# Altium PCB 摇杆总图.PcbDoc (part 1 of 2)
Units mil, origin at the board's own origin, x right, y up, seen from the top; angles counter-clockwise.
Board outline 1476.43 x 1476.37 mil, 2 copper layers (Top Layer, Bottom Layer); 8 components, 0 nets, 44 pads, 36 vias.
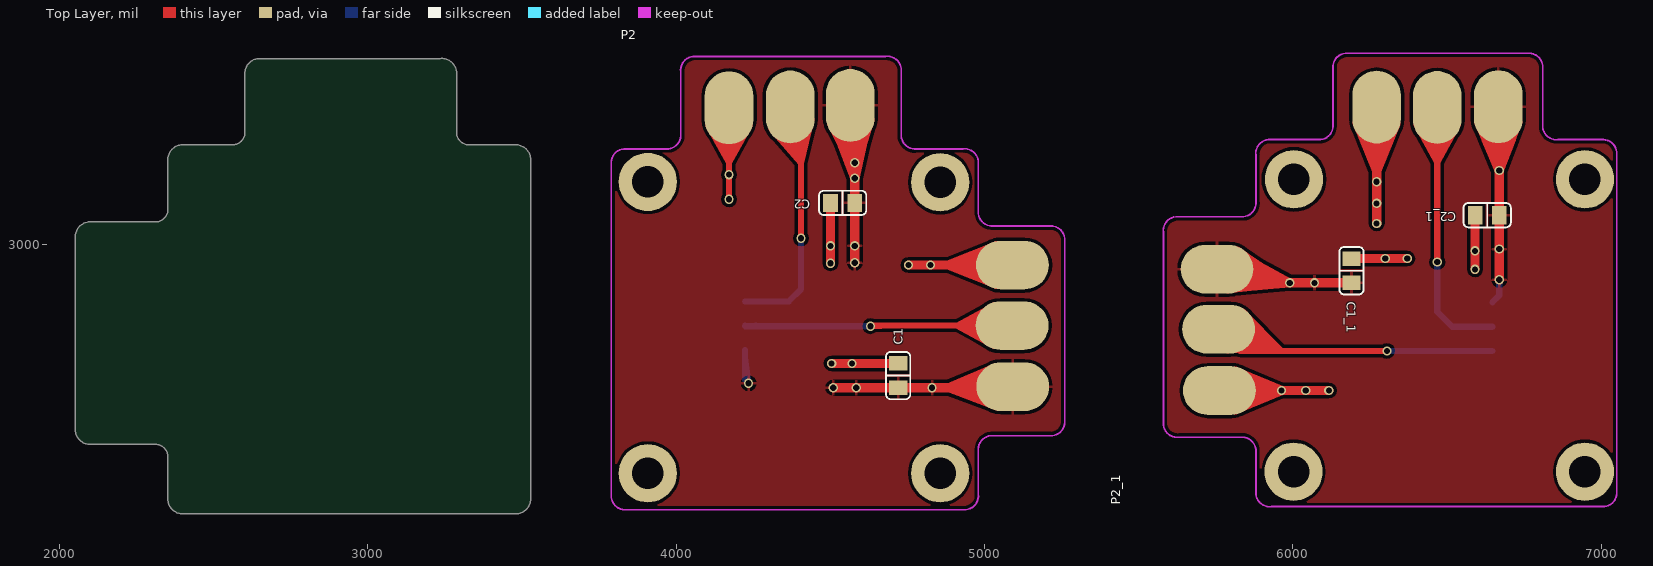
[diagram p0: Top Layer view]
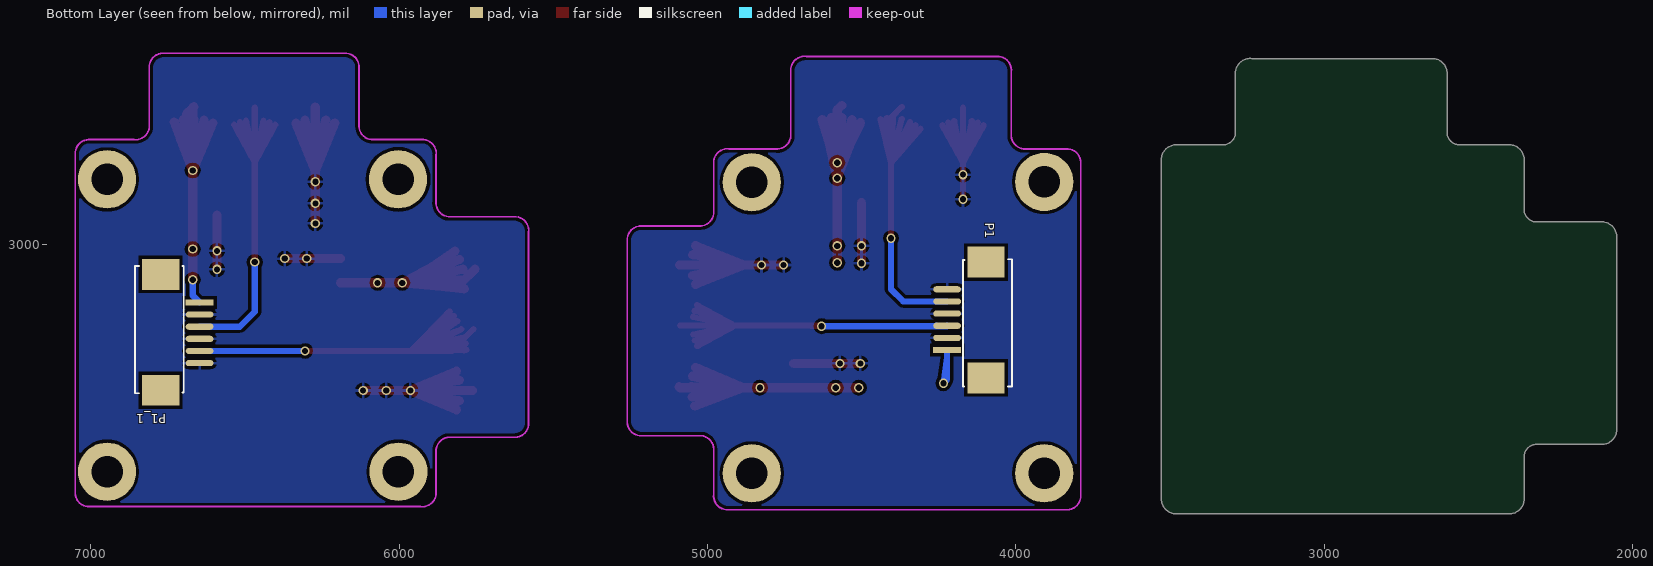
[diagram p1: Bottom Layer view, seen from below]

## Layer stack, top to bottom
Top Layer: signal copper 1.4
Dielectric: dielectric 12.6, FR-4, Dk 4.8
Bottom Layer: signal copper 1.4

## Board outline
2105.16,2352.03 2304.98,2352.03 ccw(c2305,2355) 2305.33,2352.05 cw(c2310,2310) 2352.03,2314.83 2352.03,2170.02 ccw(c2355,2170) 2352.05,2169.67 ccw(c2400,2175) 2405.16,2127.03 3484.98,2127.03 ccw(c3485,2130) 3485.33,2127.05 ccw(c3480,2175) 3528.24,2175 ccw(c3480,2175) 3527.97,2180.16 3527.97,3280 cw(c3525,3280) 3527.97,3279.98 3527.97,3280 ccw(c3525,3280) 3527.95,3280.33 ccw(c3480,3275) 3474.84,3322.97 3335.02,3322.97 ccw(c3335,3320) 3334.67,3322.95 cw(c3330,3365) 3287.97,3360.17 3287.97,3560 ccw(c3285,3560) 3287.95,3560.33 ccw(c3240,3555) 3234.84,3602.97 2645.02,3602.97 ccw(c2645,3600) 2644.67,3602.95 ccw(c2650,3555) 2602.03,3549.84 2602.03,3360.17 cw(c2560,3365) 2564.83,3322.97 2395.02,3322.97 ccw(c2395,3320) 2394.67,3322.95 ccw(c2400,3275) 2352.03,3269.84 2352.03,3120.02 ccw(c2355,3120) 2352.05,3119.67 cw(c2310,3115) 2352.31,3115 cw(c2310,3115) 2314.83,3072.97 2095.02,3072.97 ccw(c2095,3070) 2094.67,3072.95 ccw(c2100,3025) 2052.03,3019.84 2052.03,2395.02 ccw(c2055,2395) 2052.05,2394.67 ccw(c2100,2400)

## Design rules (kind name [scope] priority, off if disabled: settings)
Clearance [All] p1: gap=10
PolygonConnect [All] p1: connectstyle=Relief reliefconductorwidth=10 reliefentries=4 polygonreliefangle="90 Angle"
RoutingVias [All] p1: holewidth=28 width=50 viastyle="Through Hole" minholewidth=28 minwidth=50 maxholewidth=28 maxwidth=50
SilkscreenOverComponentPads [All] p1: minsilkscreentomaskgap=10
SolderMaskExpansion [All] p1: expansion=4
Width [All] p1: maxlimit=10 minlimit=10 preferedwidth=10
27 further rules are at their usual default settings.

## Components (designator, comment, footprint, x,y, rotation, side; value= is the part's Value field where it differs from the comment)
C1 "100pF" C0805 4720,2575 r90 top
C1_1 "100pF" C0805 6190,2915 r90 top (schematic designator C1)
C2 "1uF" C0805 4540,3135 r180 top
C2_1 "1uF" C0805 6630,3095 r180 top (schematic designator C2)
P1 "Header 6" FFC/SM1.0-6 4160,2755 r90 bottom
P1_1 "Header 6" FFC/SM1.0-6 6710,2715 r270 bottom (schematic designator P1)
P2 "Header 6" H20JH 4500,2995 r0 top locked
P2_1 "Header 6" H20JH 6210,2855 r90 top (schematic designator P2)

## Footprints (in the part's own frame and the unit in brackets; to place one, negate y for a bottom-side part, rotate by r counter-clockwise, add the part's x,y. Pads: shape width x height; smd on the part's side, far side on the other; paste and mask are expansions set on the pad)
C0805 [mm]
  rect 1.2x1.5 smd: 1(-1,0) 2(1,0)
  silkscreen extent -1.95,-1 1.95,1, body extent -1.02,-0.64 1.02,0.64, height 0.61
FFC/SM1.0-6 [mm]
  rect 2.54x3.08 smd: 0(-4.77,-1.6) 0(4.77,-1.6)
  rect 0.508x2.286 smd: 1(-2.47,1.6)
  oval 0.508x2.286 smd: 2(-1.47,1.6) 3(-0.47,1.6) 4(0.53,1.6) 5(1.53,1.6) 6(2.53,1.6)
  silkscreen extent -5.47,-3.73 5.01,0.3
H20JH [mm]
  round 4.8 hole 2.6: 0(-15.028,-18.72) 0(-15.027,5.28) 0(9.05,-18.72) 0(9.05,5.25)
  oval 6x4 smd: 1(15.028,-11.585) 2(14.978,-6.555) 3(14.998,-1.565)
  oval 4x6 smd: 4(1.647,11.585) 5(-3.293,11.455) 6(-8.343,11.385)
  body extent -18.03,-21.7 22.47,18.8, height 3.7

## Part data
C1 C1_1 C2 C2_1: library part Cap, "Capacitor"
P1 P1_1 P2 P2_1: "Header, 6-Pin"

## Via types
v1: diameter 30, hole 20, Top Layer to Bottom Layer, 30 vias
v2: diameter 30, hole 20, Top Layer to Bottom Layer, tented both sides, 6 vias

## Nets (pads, with @x,y where several pads share a name; then routed paths per layer and width w, separated by ;. In a path a pad name is that pad's centre, name@x,y a point inside that pad or via, vN(x,y) a via of type N, cw(c..) or ccw(c..) an arc to the next point about the centre after c; other vN are vias at no path point)
pads on no net: C1.1 C1.2 C1_1.1 C1_1.2 C2.1 C2.2 C2_1.1 C2_1.2 P1.0 P1.1 P1.2 P1.3 P1.4 P1.5 P1.6 P1_1.0 P1_1.1 P1_1.2 P1_1.3 P1_1.4 P1_1.5 P1_1.6 P2.0 P2.1 P2.2 P2.3 P2.4 P2.5 P2.6 P2_1.0 P2_1.1 P2_1.2 P2_1.3 P2_1.4 P2_1.5 P2_1.6